# Altium PCB B232.PcbDoc
Units mm, origin at the board's own origin, x right, y up, seen from the top; angles counter-clockwise.
Board outline 40 x 22 mm, 4 copper layers (Top Copper, Signal Layer 1, Signal Layer 2, Bottom Copper), stack 1.57 mm thick; 17 components, 23 nets, 125 pads, 275 vias.
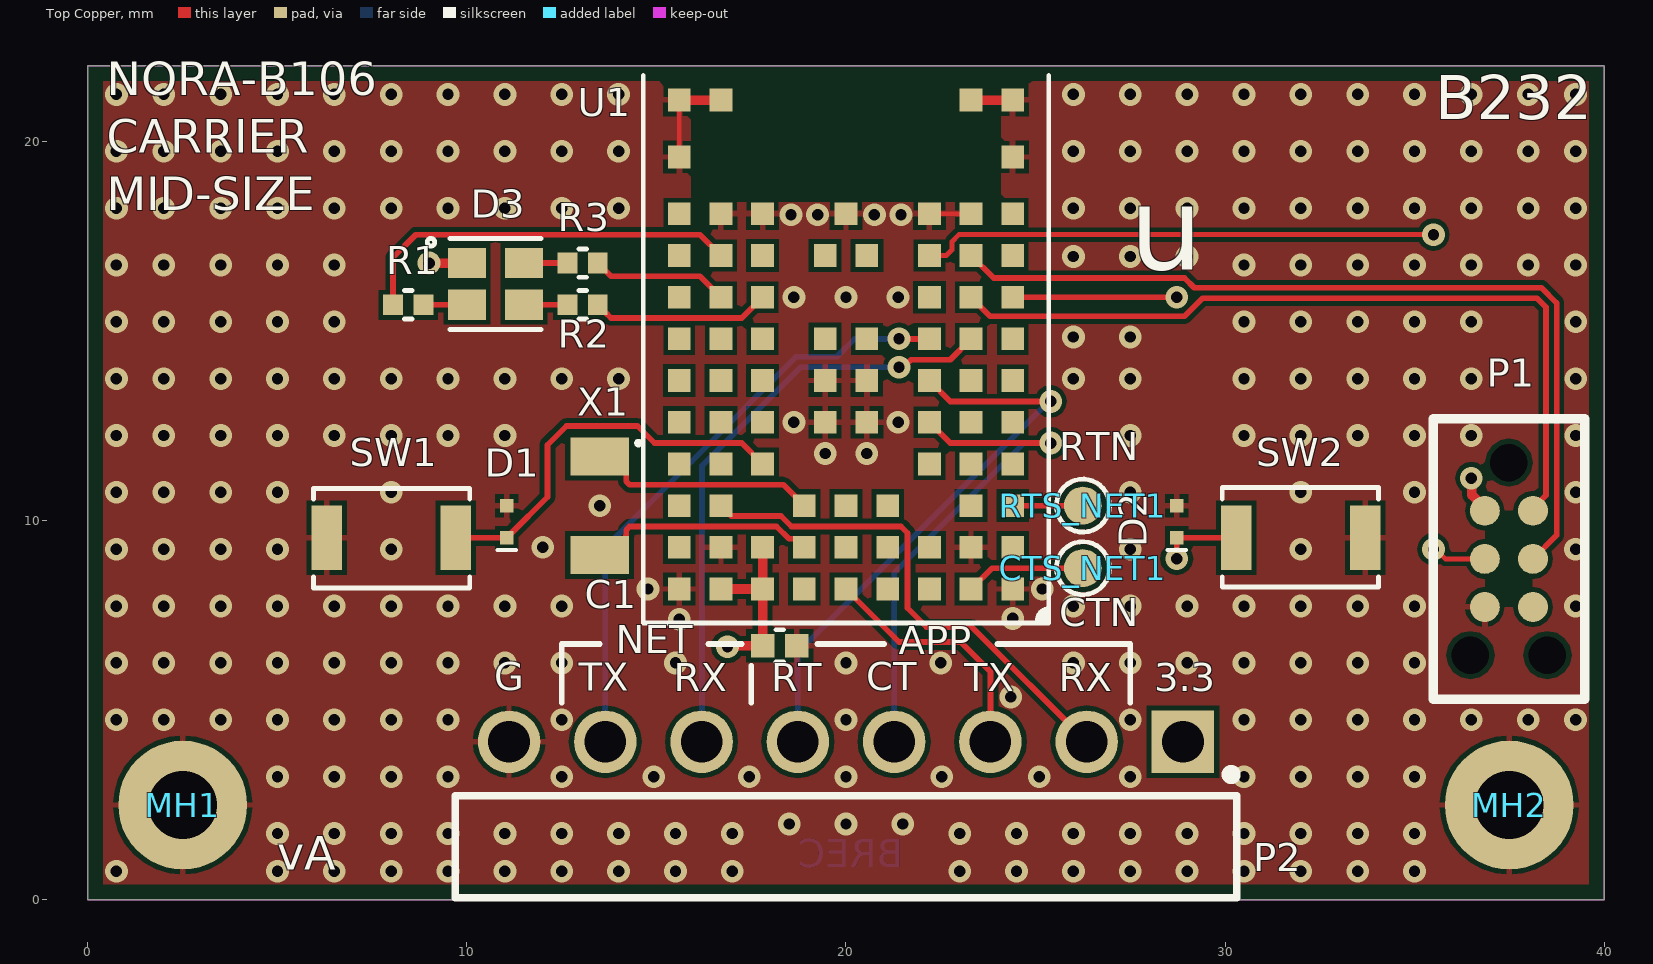
[diagram p0: Top Copper view]
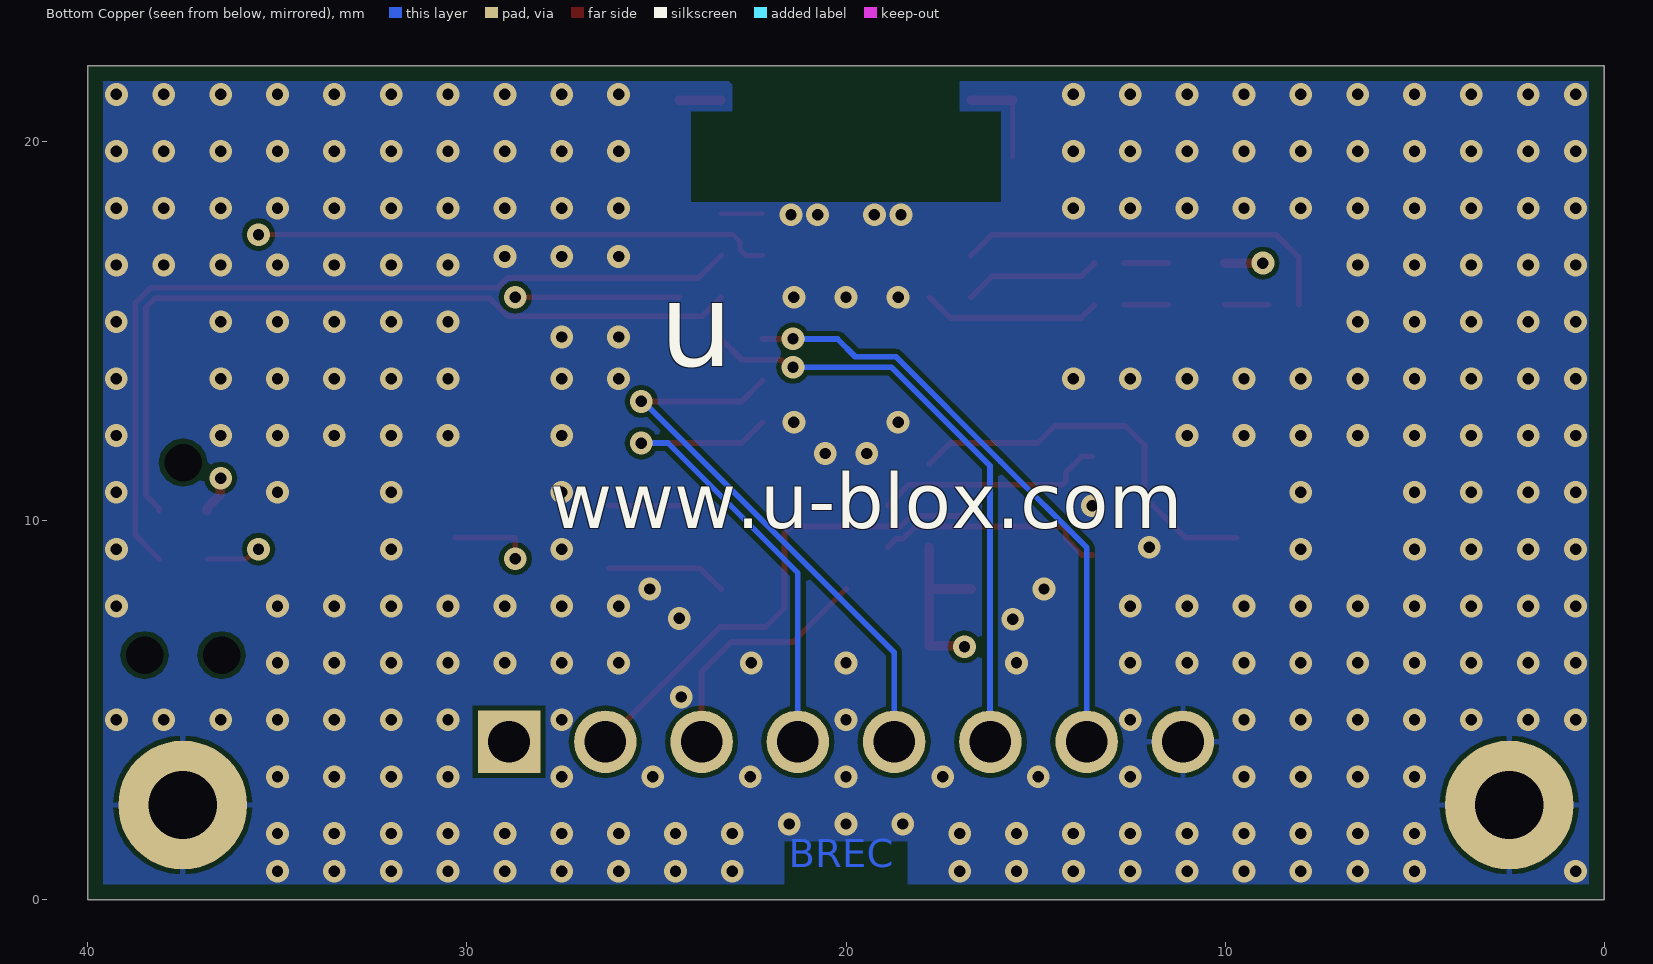
[diagram p1: Bottom Copper view, seen from below]
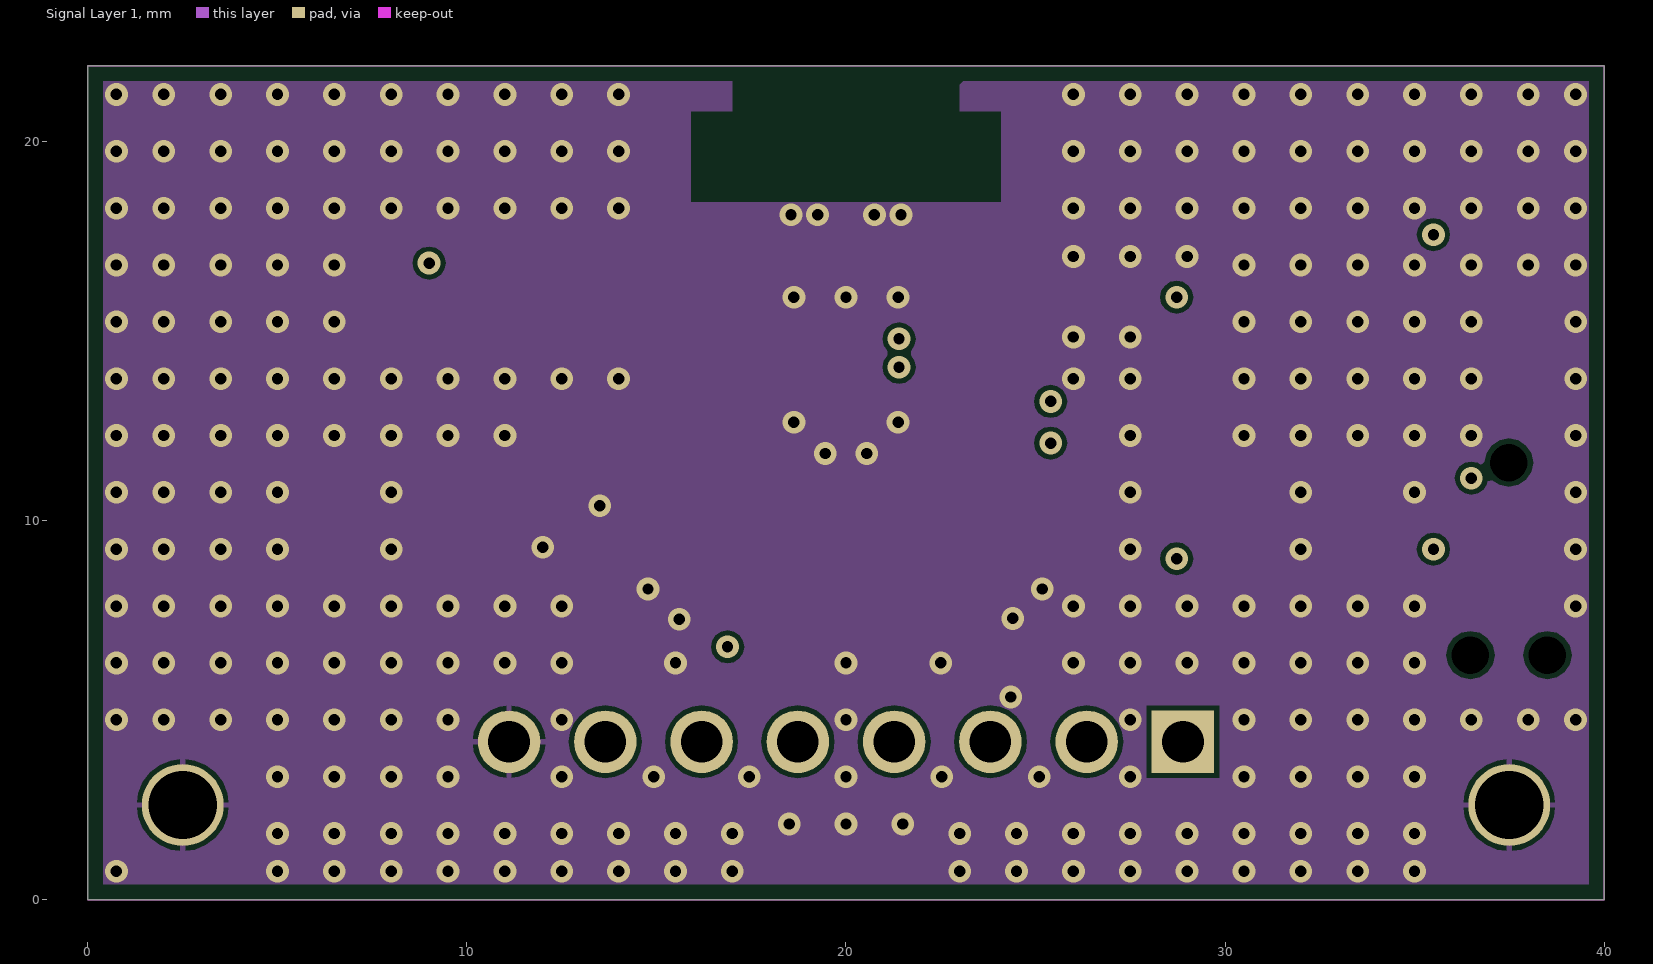
[diagram p2: Signal Layer 1]
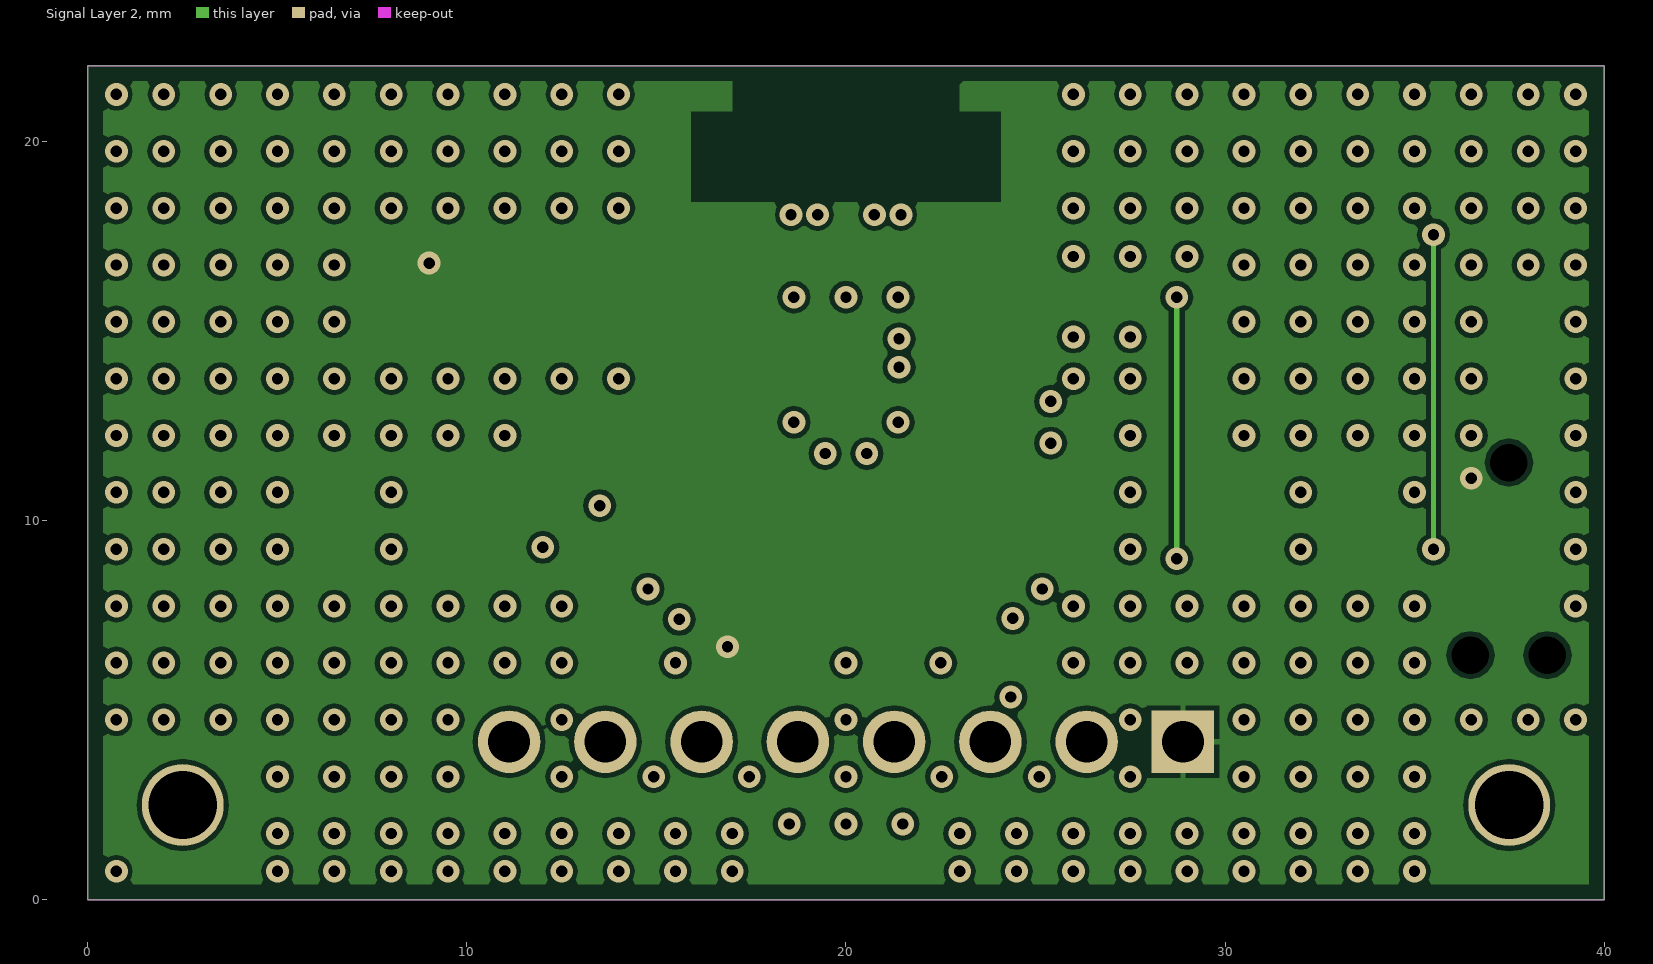
[diagram p3: Signal Layer 2]

## Layer stack, top to bottom
Top Mask: solder mask 0.015, Solder Resist, Dk 3.8
Top Copper: signal copper 0.035
Dielectric 1: prepreg 0.1, 2313, Dk 4.05
Signal Layer 1: signal copper 0.0175
Core: core 1.265, FR-4, Dk 4.5
Signal Layer 2: signal copper 0.0175
Dielectric 2: prepreg 0.1, 2313, Dk 4.05
Bottom Copper: signal copper 0.035
Bottom Mask: solder mask 0.015, Solder Resist, Dk 3.8

## Board outline
0,22 40,22 40,0 0,0

## Design rules (kind name [scope] priority, off if disabled: settings)
BoardOutlineClearance [All] p1: gap=0.4 ignorepadtopadclearanceinfootprint=FALSE
Clearance "Stitching GND" [IsStitchingVia and InNet('GND') vs (IsVia and (Not IsStitchingVia)) Or IsPad] p1: gap=0.127 ignorepadtopadclearanceinfootprint=TRUE
Clearance Clearance_Poly [InPolygon vs OnLayer('Keep-Out Layer') OR (OnLayer('Multi-Layer') AND IsPad  AND Not(PadIsPlated))] p2: gap=0.127 ignorepadtopadclearanceinfootprint=TRUE
Clearance [All] p3: gap=0.127 ignorepadtopadclearanceinfootprint=FALSE except(0: Arc-Text Arc-Hole Track-Text Track-Hole SMDPad-Text SMDPad-Hole THPad-Text THPad-Hole Via-Text Via-Hole Fill-Text Fill-Hole Poly-Text Poly-Hole Region-Text Region-Hole Text-Text Text-Hole)
ComponentClearance [All] p1: gap=0.127 collisioncheckmode=3 verticalgap=0.254 showdistances=FALSE
DiffPairsRouting .14 [All] p1: maxlimit=0.254 minlimit=0.1 mostfreqgap=0.254 toplayer_maxgap=0.1 toplayer_prefgap=0.1 toplayer_minwidth=0.1 toplayer_maxwidth=0.1 toplayer_prefwidth=0.1 midlayer1_mingap=0.254 midlayer1_minwidth=0.381 midlayer1_maxwidth=0.381 midlayer1_prefwidth=0.381 midlayer2_mingap=0.254 midlayer2_minwidth=0.381 midlayer2_maxwidth=0.381 midlayer2_prefwidth=0.381 bottomlayer_maxgap=0.1 bottomlayer_prefgap=0.1 bottomlayer_minwidth=0.1 bottomlayer_maxwidth=0.1 bottomlayer_prefwidth=0.1 maxuncoupledlength=12.7
Height [All] p1: minheight=0 maxheight=25.4 prefheight=2.54
HoleSize [All] p1: absolutevalues=TRUE maxlimit=2540 minlimit=0.127 maxpercent=80.000 minpercent=20.000
HoleToHoleClearance [All] p1: gap=0.152 allowstackedmicrovias=TRUE
MinimumSolderMaskSliver [All] p1: minsoldermaskwidth=0.025
PlaneClearance [InPoly] p1: clearance=0.254
PlaneConnect [All] p1: pad.planeconnectstyle=Relief pad.reliefexpansion=0.508 pad.reliefentries=4 pad.reliefconductorwidth=0.254 pad.reliefairgap=0.254 via.planeconnectstyle=Direct via.reliefexpansion=0.508 via.reliefentries=4 via.reliefconductorwidth=0.254 via.reliefairgap=0.254
PolygonConnect ThermalVias [IsVia] p1: connectstyle=Direct reliefconductorwidth=0.254 reliefentries=4 polygonreliefangle="90 Angle" airgapwidth=0.254
PolygonConnect "PolygonConnect - Power" [InNetClass('')] p2: connectstyle=Relief reliefconductorwidth=0.254 reliefentries=4 polygonreliefangle="90 Angle" airgapwidth=0.127
PolygonConnect PolygonConnect-BGA [InComponentClass('')] p3: connectstyle=Relief reliefconductorwidth=0.152 reliefentries=4 polygonreliefangle="45 Angle" airgapwidth=0.152
PolygonConnect PolygonConnect-General [All] p4: connectstyle=Relief reliefconductorwidth=0.152 reliefentries=4 polygonreliefangle="90 Angle" airgapwidth=0.127
RoutingLayers [All] p1: top layer_v5=TRUE mid layer 1_v5=FALSE mid layer 2_v5=TRUE bottom layer_v5=TRUE
RoutingVias [All] p1: holewidth=0.3 width=0.6 viastyle="Through Hole" minholewidth=0.2 minwidth=0.5 maxholewidth=7 maxwidth=1
SMDEntry [All] p1 off: side=TRUE corner=TRUE anyangle=TRUE
SilkToBoardRegionClearance [All] p1 off:
SilkToSilkClearance [All] p1 off: silktosilkclearance=0.025
SilkToSolderMaskClearance [IsPad] p1 off: minsilkscreentomaskgap=0 clearancetoexposedcopper=TRUE
SolderMaskExpansion SolderMaskExpansion_via [IsVia] p1: expansion=-0.254 istentingtop=TRUE
SolderMaskExpansion [All] p2: expansion=0.05 istentingtop=FALSE
UnRoutedNet [All] p1: checkbadconnections=TRUE
ViasUnderSMD [All] p1: allowed=FALSE
Width [All] p1: maxlimit=2.54 minlimit=0.127 preferedwidth=0.152 toplayer_maxwidth=0.254 toplayer_prefwidth=0.152 bottomlayer_maxwidth=0.254 bottomlayer_prefwidth=0.152 minimp=50.000000 maximp=50.000000 favimp=50.000000
Width Width_1 [All] p2: maxlimit=0.254 minlimit=0.254 preferedwidth=0.254
17 further rules are at their usual default settings.

## Components (designator, comment, footprint, x,y, rotation, side; value= is the part's Value field where it differs from the comment)
C1 "UBXH01-2021002100N" "Cap 0402" 18.25,6.7 r0 top value=100N
CTS_NET1 "TP" TP10R 26.25,8.75 r90 top
D1 "110-00019" SOD-923 11.05,9.975 r90 top
D2 "110-00019" SOD-923 28.725,9.975 r90 top
D3 "115-00011" 4-PLCC 10.75,16.25 r180 top
MH1 "MH_M1.5DNP" MH_M1.5 2.5,2.5 r0 top
MH2 "MH_M1.5DNP" MH_M1.5 37.5,2.5 r0 top
P1 "TC2030-IDC-NLDNP" TC2030-IDC-NL 37.49,11.535 r270 top
P2 "61300811021" 61300811021 20,1.4 r0 top
R1 "180-00031499R" "RES 0402 HD" 8.45,15.7 r180 top value=499R
R2 "180-00098220R" "RES 0402 HD" 13.05,15.7 r0 top value=220R
R3 "180-00098220R" "RES 0402 HD" 13.05,16.8 r0 top value=220R
RTS_NET1 "TP" TP10R 26.25,10.4 r90 top
SW1 "135-00007" B3U-1000P 8,9.55 r180 top
SW2 "135-00007" B3U-1000P 32,9.55 r0 top
U1 "NORA-B106" NORA_LGA82R_1430X1040X180_ANT 20,13.7 r90 top
X1 "100-00005" XTAL_3215 13.5,10.4 r270 top

## Footprints (in the part's own frame and the unit in brackets; to place one, negate y for a bottom-side part, rotate by r counter-clockwise, add the part's x,y. Pads: shape width x height; smd on the part's side, far side on the other; paste and mask are expansions set on the pad)
4-PLCC [mm] "4 Pin Plastic Leaded Chip Carrier, 2mm x 2mm"
  rect 1x0.8 smd: 1(0.75,-0.55) 2(-0.75,-0.55) 3(-0.75,0.55) 4(0.75,0.55)
  silkscreen extent -1.2,-1.2 1.8,1.2, body extent -1.05,-1.05 1.05,1.05, height 1.01
61300811021 [mm]
  rect 1.65x1.65 hole 1.1: 1(8.89,2.77)
  round 1.65 hole 1.1: 2(6.35,2.77) 3(3.81,2.77) 4(1.27,2.77) 5(-1.27,2.77) 6(-3.81,2.77) 7(-6.35,2.77) 8(-8.89,2.77)
  silkscreen extent -10.31,-1.35 10.31,2.03, body extent -10.16,-7.27 10.16,3.09, height 2.58
B3U-1000P [mm] "Button Tactile, SMT 4mm x 2.5mm, height 1.2mm"
  rect 0.8x1.7 smd: 1(-1.7,0) 2(1.7,0)
  silkscreen extent -2.07,-1.3 2.05,1.33, body extent -2,-1.25 2,1.25, height 1.6
"Cap 0402" [mm] "Chip Capacitor, 2-Leads, Body 1.00x0.50mm, IPC Medium Density"
  rect 0.62x0.62 smd: 1(-0.45,0) 2(0.45,0)
  silkscreen extent -0.1,-0.43 0.1,0.43, body extent -0.55,-0.3 0.55,0.3, height 0.6
MH_M1.5 [mm] "Mounting Hole M1.5 Metric, 3.4mm diameter pad"
  round 3.4 / inner round 2.159 / far side round 3.4 hole 1.8: 1(0,0)
NORA_LGA82R_1430X1040X180_ANT [mm] "NORA LGA, 82pin ,1.1mm Pitch, 14.3mm x 10.4mm"
  rect 0.6x0.6 smd: A1(-5.5,-4.4) A2(-5.5,-3.3) A3(-5.5,-2.2) A4(-5.5,-1.1) A5(-5.5,0) A6(-5.5,1.1) A7(-5.5,2.2) A8(-5.5,3.3) A9(-5.5,4.4) B1(-4.4,-4.4) B2(-4.4,-3.3) B3(-4.4,-2.2) B4(-4.4,-1.1) B5(-4.4,0) B6(-4.4,1.1) B7(-4.4,2.2) B8(-4.4,3.3) B9(-4.4,4.4) C1(-3.3,-4.4) C2(-3.3,-3.3) C4(-3.3,-1.1) C5(-3.3,0) C6(-3.3,1.1) C8(-3.3,3.3) C9(-3.3,4.4) D1(-2.2,-4.4) D2(-2.2,-3.3) D3(-2.2,-2.2) D7(-2.2,2.2) D8(-2.2,3.3) D9(-2.2,4.4) E1(-1.1,-4.4) E2(-1.1,-3.3) E3(-1.1,-2.2) E4(-1.1,-0.55) E5(-1.1,0.55) E7(-1.1,2.2) E8(-1.1,3.3) E9(-1.1,4.4) F1(0,-4.4) F2(0,-3.3) F3(0,-2.2) F4(0,-0.55) F5(0,0.55) F7(0,2.2) F8(0,3.3) F9(0,4.4) G1(1.1,-4.4) G2(1.1,-3.3) G3(1.1,-2.2) G4(1.1,-0.55) G5(1.1,0.55) G7(1.1,2.2) G8(1.1,3.3) G9(1.1,4.4) H1(2.2,-4.4) H2(2.2,-3.3) H3(2.2,-2.2) H7(2.2,2.2) H8(2.2,3.3) H9(2.2,4.4) J1(3.3,-4.4) J2(3.3,-3.3) J3(3.3,-2.2) J4(3.3,-0.55) J5(3.3,0.55) J7(3.3,2.2) J8(3.3,3.3) J9(3.3,4.4) K1(4.4,-4.4) K2(4.4,-3.3) K3(4.4,-2.2) K5(4.4,0) K7(4.4,2.2) K8(4.4,3.3) K9(4.4,4.4) L1(5.9,-4.4) L9(5.9,4.4) M1(7.4,-4.4) M2(7.4,-3.3) M8(7.4,3.3) M9(7.4,4.4)
  Multi-Layer pour cut-out: 7.1,-4.1 7.1,-3.001 7.9,-2.998 7.9,-5.225 8.25,-5.225 8.25,5.325 7.9,5.325 7.9,3 7.1,3 7.1,4.1 4.7,4.1 4.7,-4.1
  silkscreen extent -6.4,-5.35 8.05,5.35, body extent -6.25,-5.2 8.05,5.2, height 1.78
"RES 0402 HD" [mm] "Chip Resistor, 2-Leads, Body 1.05x0.54mm, IPC High Density"
  rect 0.52x0.55 smd: 1(-0.4,0) 2(0.4,0)
  silkscreen extent -0.1,-0.38 0.1,0.38, body extent -0.55,-0.3 0.55,0.3, height 0.4
SOD-923 [mm] "SOD-923, 2-Leads, Body 1.25x2.50mm, IPC High Density,"
  rect 0.36x0.35 smd mask+0.05: 1(-0.42,0) 2(0.42,0)
  silkscreen extent -0.75,-0.25 -0.75,0.25, body extent -0.4,-0.3 0.4,0.3, height 0.4
TC2030-IDC-NL [mm] "Tag-Connect 6-Pin No Legs"
  round 0.9 hole 0.995 unplated: 0(0,0) 0(5.08,-1.016) 0(5.08,1.016)
  round 0.79 smd paste-0.39: 1(1.27,-0.635) 2(1.27,0.635) 3(2.54,-0.635) 4(2.54,0.635) 5(3.81,-0.635) 6(3.81,0.635)
  silkscreen extent -1.16,-2 6.24,2
TP10R [mm] "Testpoint, Round 1.0mm Dia"
  round 1 smd paste-0.5: 1(0,0)
  silkscreen extent -0.7,-0.7 0.7,0.7, body extent -0.5,-0.5 0.5,0.5, height 0.05
XTAL_3215 [mm] "XTAL, 2-Leads, Body 1.50x3.20mm"
  rect 1x1.55 smd: 1(-1.3,0) 2(1.3,0)
  silkscreen extent -1.7,0.98 -1.6,1.07, body extent -1.65,-0.8 1.65,0.8, height 0.9

## Part data
C1: library part UBXH01-2021002, "CAP CER X5R 0402", Manufacturer="Samsung Electro-Mechanics", Manufacturer 2=None, Manufacturer P/N=CL05A104KP5NNN, Max Voltage=10.0V, Tolerance=10%, Automotive=None, Critical=None, Editor=roland.rust, Env=GREEN, Manufacturer 3=None, Manufacturer P/N 2=None, Manufacturer P/N 3=None, Max Current=None, Max Operating Temp=None, Max Power=None, Mfg P/N Datasheet=https://wiki.u-blox.com/bin/view/Generic/Docs/DocumentSummary?index=28113, Mfg P/N Datasheet 2=None, Mfg P/N Datasheet 3=None, Mfg P/N Released=Yes, Mfg P/N Released 2=None, Mfg P/N Released 3=None, Mfg P/N Split=0, Mfg P/N Split 2=None, Mfg P/N Split 3=None, Mfg P/N Status=Active, Mfg P/N Status 2=None, Mfg P/N Status 3=None, Min Operating Temp=None, Part Number=UBXH01-2021002, Part Type=Capacitor, Perferred=PREF, Permitted Use="Volume Products", RefDes=C, Release Data="2005-07-22 13:59:44", Released by=roland.rust, Single Source=None, Size=0x0y, UBX Wiki=https://wiki.u-blox.com/bin/view/Operations/PartDetails?index=5759
CTS_NET1 RTS_NET1: library part TP10R, "Testpoint, Round 1.0mm Dia", Added By="Jeremy D", Added Date=2/1/2015, Checked By="Paul B", Checked Date=2/5/2015, DNP=DNP, Height=0, Part Number=TP10R, Size=1.0mm
D1 D2: "Diode, ESD9B, 3.3V, ST5G, SOD-923", Manufacturer="ON Semiconductor", Manufacturer P/N=ESD9B3.3ST5G, MFG Package=SOD-923, Package Type=SOD, Part Name="Diode TVS 3.3V SOD-923", Voltage=3.3V, Arena Link=https://app.bom.com/a/4M5DJQ9Q9SR7DV4H?v=spec.summary, Body Size="0.8mm x 0.6mm", Component Mounting Type=SMT, Diode Type=TVS, Height=0.4mm, Item_Phase=Production, Part Number=110-00019, Part_Type=Diode, Pins=2, Revision=0A, Supplier 1=Arrow, Supplier Part Number 1=ESD9B3.3ST5G, Use in new designs=Yes
D3: "LED, RGB Diffused SMT, PLCC4 4 Pin", Color=RGB, Current="20mA Red, 10mA Green, 10mA, Blue", Manufacturer="Cree, Inc.", Manufacturer P/N=CLMVB-FKA-CFHEHLCBB7a363, MFG Package=PLCC4, Package Type=Custom, Part Name="LED RGB SMT 2mm x 2mm", Supplier Part Number 1=941-CLMVBFKACFHEHLCB, Voltage=5V, Arena Link=https://app.bom.com/a/UCV39GZGZIHY581D?v=spec.summary, Body Size="2.0mm x 2.0mm", Component Mounting Type=SMT, Height=1mm, Item_Phase=Production, Mounting Type=Vertical, Number of Circuits=3, Part Number=115-00011, Part_Type=LED, Pins=4, Revision=0A, Supplier 1=Mouser, Use in new designs=Yes, Vf="2V Red, 3V Green, 3V Blue"
MH1 MH2: library part MH_M1.5, "1.5M screw mounting hole, plated", Added By="Jeremy D", Added Date=7/9/2015, DNP=DNP, Height=0mm, Part Number=MH_M1.5, Size="3.4mm x 3.4mm", Type="Mounting Hole"
P1: library part TC2030-IDC-NL, "CON PADS FOR CBL PLUG-OF-NAILS 6-PIN NO LEGS", Manufacturer="TAG Connect", Added By="Paul B", Added Date=4/22/2015, DNP=DNP, Height=0, Manufacturer P/N=TC2030-IDC-NL, Part Number=TC2030-IDC-NL, Size="6.731mm x 12.446mm"
P2: library part CMP-1502-01075-1, "THT Angled Pin Header WR-PHD, Pitch 2.54 mm, Single Row, 8 pins", Contact Resistance=20mOhm, Manufacturer="Wurth Electronics", Operating Temperature=-40to105degC, Rated Current=3A, Withstanding Voltage=500VAC, Working Voltage=250VAC, Datasheet URL=https://katalog.we-online.de/em/datasheet/6130xx11021.pdf, Gender=Male, Manufacturer Part Number=61300811021, Manufacturer URL=http://www.we-online.de, Mounting Technology=THT, Orientation=Angled, Package Reference=61300811021, Packaging=Bag, Part Number=61300811021, Pin Number=8, Pitch=2.54mm, Publisher=WurthElektronik, Row Number=Single
R1: library part 180-00031, "Resistor, 499ohm, 1%, 1/16W, 0402", Manufacturer="Rohm Semiconductor", Manufacturer 2="Samsung Electro-Mechanics America, Inc", Manufacturer P/N=MCR01MRTF4990, Manufacturer P/N 2=RC1005F4990CS, Part Name="RES SMD 499 OHM 1% 1/16W 0402", Power=1/16W, Supplier Part Number 1=RHM499CDCT-ND, Tolerance="+/- 1%", Alternate Footprint Ref="RES 0402", Arena Link=https://app.bom.com/a/Q8RZ5CVCVEDU1SS5?v=spec.summary, Component Mounting Type=SMT, Height=0.4mm, Item_Phase=Production, Part Number=180-00031, Part_Type=Resistor, Pins=2, Revision=0D, Size=0402, Supplier 1=Digi-Key, Supplier 2=Digi-Key, Supplier Part Number 2=1276-3992-1-ND, Use in new designs=Yes
R2 R3: library part 180-00098, "Resistor, 220ohm, 5%, 1/16W, 0402.", Manufacturer="Panasonic Electronic Components", Manufacturer 2="Samsung Electro-Mechanics America, Inc", Manufacturer P/N=ERJ-2GEJ221X, Manufacturer P/N 2=RC1005J221CS, Part Name="RES SMD 220 OHM 5% 1/16W 0402", Power=1/16W, Supplier Part Number 1=P220JCT-ND, Tolerance="+/- 5%", Alternate Footprint Ref="RES 0402", Arena Link=https://app.bom.com/a/8Q9HNUDUDWVBJC30?v=spec.summary, Component Mounting Type=SMT, Height=0.4mm, Item_Phase=Production, Part Number=180-00098, Part_Type=Resistor, Pins=2, Revision=0C, Size=0402, Supplier 1=Digi-Key, Supplier 2=Digi-Key, Supplier Part Number 2=1276-4360-1-ND, Use in new designs=Yes
SW1 SW2: "Button, Momentary SPST-NO, 0.05A, 12V, 3mm x 2.5mm", Current=50mA, Manufacturer="Omron Electronics Inc-EMC Div", Manufacturer P/N=B3U-1000P, Part Name="SWITCH TACTILE SPST-NO 0.05A 12V", Supplier Part Number 1=SW1020CT-ND, Voltage=12VDC, Arena Link=https://app.bom.com/a/TBU28FYFYHGV5FQ0?v=spec.summary, Body Size="3mm x 2.5mm", Component Mounting Type=SMT, Height=1.2mm, Item_Phase=Production, Part Number=135-00007, Part_Type=Button, Pins=2, Revision=0A, Supplier 1=Digi-Key, Switch/Button Circuit=SPST, Switch/Button Function=Off-Mom, Use in new designs=Yes
U1: "u-blox NORA-B106 Bluetooth 5.2 LE module - dual core", Manufacturer=u-blox, Manufacturer P/N=NORA-B106-00B, Body Size="14.3 mm x 10.4 mm", Height="1.8 mm", Part Description="Stand-alone Bluetooth low energy module - dual core", Part Name=NORA-B106, Part Number=NORA-B106, Part_Type=Module
X1: "XTAL, 2Pin, 32.768kHz, 7pF 20ppm", Frequency=32.768kHz, Frequency Tolerance=20ppm, Manufacturer=Epson, Manufacturer 2="AVX Corporation", Manufacturer P/N="FC-135 32.7680KA-AG3", Manufacturer P/N 2=ST3215SB32768C0HPWBB, MFG Package=2-SMD, Part Name="XTAL 32.768kHz 7pF 20ppm 3215", Supplier Part Number 1=SER4086CT-ND, Arena Link=https://app.bom.com/a/L3MU07Q7Q98O5PC8?v=spec.summary, Body Size="3.2mm x 1.5mm", CL=7pF, Component Mounting Type=SMT, Height=0.9mm, Item_Phase=Production, Part Number=100-00005, Part_Type=Crystal/Oscillator, Pins=2, Revision=0C, Supplier 1=Digi-Key, Supplier 2=Digi-Key, Supplier Part Number 2=1253-1113-1-ND, Use in new designs=Yes

## Via types
v1: diameter 0.6, hole 0.3, Top Copper to Bottom Copper, tented both sides, 275 vias

## Nets (pads, with @x,y where several pads share a name; then routed paths per layer and width w, separated by ;. In a path a pad name is that pad's centre, name@x,y a point inside that pad or via, vN(x,y) a via of type N, cw(c..) or ccw(c..) an arc to the next point about the centre after c; other vN are vias at no path point)
3V3: C1.1 D3.1 P1.1 P2.1 U1.A7 U1.A8 U1.B7 | length 6.6
  Top Copper w0.254: v1(9,16.8) D3.1 ; U1.A8 U1.A7 ; v1(16.875,6.675) 16.9,6.7 C1.1 17.8,6.804 U1.A7 ; U1.B7 U1.A7 ; v1(36.5,11.125) 36.512,11.113 36.512,10.682 36.855,10.339 P1.1
BLUE: R3.2 U1.H8 | length 3.6
  Top Copper w0.152: R3.2 13.45,16.785 13.634,16.601 13.649,16.601 13.8,16.45 16.15,16.45 U1.H8
BUTTON_1: D1.1 SW1.1 U1.D7 | length 10.5
  Top Copper w0.152: SW1.1 9.705,9.555 D1.1 11.05,9.56 11.149,9.659 11.154,9.659 12.125,10.63 12.125,12 12.625,12.5 14.5,12.5 14.95,12.05 17.25,12.05 U1.D7
BUTTON_2: D2.1 SW2.1 U1.H1 | length 13.4
  Top Copper w0.152: U1.H1 v1(28.725,15.9) ; v1(28.725,9) D2.1 30.295,9.555 SW2.1
  Signal Layer 2 w0.152: v1(28.725,9) v1(28.725,15.9)
CTS_APP: P2.4 U1.E3 | length 13.4
  Top Copper w0.152: U1.E3 22.75,12.05 v1(25.4,12.05)
  Bottom Copper w0.152: P2.4 21.27,8.625 24.695,12.05 v1(25.4,12.05)
CTS_NET: CTS_NET1.1 U1.A2 | length 3.2
  Top Copper w0.152: U1.A2 23.85,8.75 CTS_NET1.1
GND: C1.2 D1.2 D2.2 MH1.1 MH2.1 P1.5 P2.8 SW1.2 SW2.2 U1.A1 U1.A9 U1.B2 U1.B8 U1.E4 U1.E5 U1.F4 U1.F5 U1.K2 U1.K3 U1.K5 U1.K7 U1.K8 U1.L1 U1.L9 U1.M1 U1.M2 U1.M8 U1.M9 | length 4.8
  Top Copper w0.127: U1.L9 U1.M9 ; U1.K3 U1.K2
  Top Copper w0.254: U1.M9 U1.M8 ; U1.M2 U1.M1
  other v1: 0.75,0.75 5,0.75 6.5,0.75 8,0.75 9.5,0.75 11,0.75 12.5,0.75 14,0.75 15.5,0.75 17,0.75 23,0.75 24.5,0.75 26,0.75 27.5,0.75 29,0.75 30.5,0.75 32,0.75 33.5,0.75 35,0.75 5,1.75 6.5,1.75 8,1.75 9.5,1.75 11,1.75 12.5,1.75 14,1.75 15.5,1.75 17,1.75 23,1.75 24.5,1.75 26,1.75 27.5,1.75 29,1.75 30.5,1.75 32,1.75 33.5,1.75 35,1.75 18.5,2 20,2 21.5,2 5,3.25 6.5,3.25 8,3.25 9.5,3.25 12.5,3.25 14.925,3.25 17.45,3.25 20,3.25 22.525,3.25 25.1,3.25 27.5,3.25 30.5,3.25 32,3.25 33.5,3.25 35,3.25 0.75,4.75 2,4.75 3.5,4.75 5,4.75 6.5,4.75 8,4.75 9.5,4.75 12.5,4.75 20,4.75 27.5,4.75 30.5,4.75 32,4.75 33.5,4.75 35,4.75 36.5,4.75 38,4.75 39.25,4.75 24.35,5.35 0.75,6.25 2,6.25 3.5,6.25 5,6.25 6.5,6.25 8,6.25 9.5,6.25 11,6.25 12.5,6.25 15.5,6.25 20,6.25 22.5,6.25 26,6.25 27.5,6.25 29,6.25 30.5,6.25 32,6.25 33.5,6.25 35,6.25 15.6,7.4 24.4,7.425 0.75,7.75 2,7.75 3.5,7.75 5,7.75 6.5,7.75 8,7.75 9.5,7.75 11,7.75 12.5,7.75 26,7.75 27.5,7.75 29,7.75 30.5,7.75 32,7.75 33.5,7.75 35,7.75 39.25,7.75 14.775,8.2 25.175,8.2 0.75,9.25 2,9.25 3.5,9.25 5,9.25 8,9.25 27.5,9.25 32,9.25 39.25,9.25 12,9.3 13.5,10.4 0.75,10.75 2,10.75 3.5,10.75 5,10.75 8,10.75 27.5,10.75 32,10.75 35,10.75 39.253,10.75 19.45,11.775 20.55,11.775 0.75,12.25 2,12.25 3.5,12.25 5,12.25 6.5,12.25 8,12.25 9.5,12.25 11,12.25 27.5,12.25 30.5,12.25 32,12.25 33.5,12.25 35,12.25 36.5,12.25 39.253,12.25 18.625,12.6 21.375,12.6 0.75,13.75 2,13.75 3.5,13.75 5,13.75 6.5,13.75 8,13.75 9.5,13.75 11,13.75 12.5,13.75 14,13.75 26,13.75 27.5,13.75 30.5,13.75 32,13.75 33.5,13.75 35,13.75 36.5,13.75 39.253,13.75 26,14.85 27.5,14.85 0.75,15.25 2,15.25 3.5,15.25 5,15.25 6.5,15.25 30.5,15.25 32,15.25 33.5,15.25 35,15.25 36.5,15.25 39.253,15.25 18.625,15.9 20,15.9 21.375,15.9 0.75,16.75 2,16.75 3.5,16.75 5,16.75 6.5,16.75 30.5,16.75 32,16.75 33.5,16.75 35,16.75 36.5,16.75 38,16.75 39.25,16.75 26,16.972 27.5,16.972 29,16.972 18.55,18.075 19.25,18.075 20.75,18.075 21.45,18.075 0.75,18.25 2,18.25 3.5,18.25 5,18.25 6.5,18.25 8,18.25 9.5,18.25 11,18.25 12.5,18.25 14,18.25 26,18.25 27.5,18.25 29,18.25 30.5,18.25 32,18.25 33.5,18.25 35,18.25 36.5,18.25 38,18.25 39.25,18.25 0.75,19.75 2,19.75 3.5,19.75 5,19.75 6.5,19.75 8,19.75 9.5,19.75 11,19.75 12.5,19.75 14,19.75 26,19.75 27.5,19.75 29,19.75 30.5,19.75 32,19.75 33.5,19.75 35,19.75 36.5,19.75 38,19.75 39.25,19.75 0.75,21.25 2,21.25 3.5,21.25 5,21.25 6.5,21.25 8,21.25 9.5,21.25 11,21.25 12.5,21.25 14,21.25 26,21.25 27.5,21.25 29,21.25 30.5,21.25 32,21.25 33.5,21.25 35,21.25 36.5,21.25 38,21.25 39.25,21.25
GREEN: R2.2 U1.H7 | length 4.7
  Top Copper w0.152: R2.2 13.45,15.685 13.634,15.501 13.649,15.501 13.8,15.35 17.25,15.35 U1.H7
LFCLK1: U1.C6 X1.1 | length 6.1
  Top Copper w0.152: X1.1 13.775,11.7 14.199,11.276 14.199,11.188 14.2,11.187 14.2,11.039 14.289,10.95 18.35,10.95 U1.C6
LFCLK2: U1.B6 X1.2 | length 6.1
  Top Copper w0.152: X1.2 13.775,9.1 14.199,9.524 14.199,9.612 14.2,9.613 14.2,9.761 14.289,9.85 18.168,9.85 18.494,9.524 18.676,9.524 U1.B6
NetD3_2: D3.2 R3.1 | length 1.2
  Top Copper w0.152: D3.2 R3.1
NetD3_3: D3.3 R2.1 | length 1.2
  Top Copper w0.152: D3.3 R2.1
NetD3_4: D3.4 R1.1 | length 1.1
  Top Copper w0.152: R1.1 D3.4
nRESET: P1.3 U1.J3 | length 23.4
  Top Copper w0.127: U1.J3 22.65,17 22.797,17.147 22.797,17.366 22.981,17.55 v1(35.5,17.55) ; v1(35.5,9.25) 35.558,9.25 35.813,8.995 P1.3
  Signal Layer 2 w0.127: v1(35.5,9.25) v1(35.5,17.55)
RED: R1.2 U1.J8 | length 10.4
  Top Copper w0.152: R1.2 8.05,16.95 8.65,17.55 16.15,17.55 U1.J8
RTS_APP: P2.5 U1.F3 | length 15.2
  Top Copper w0.152: U1.F3 22.75,13.15 v1(25.4,13.15)
  Bottom Copper w0.152: P2.5 18.73,6.53 25.35,13.15 v1(25.4,13.15)
RTS_NET: RTS_NET1.1 U1.C1 | length 1.8
  Top Copper w0.152: U1.C1 RTS_NET1.1
RXD_APP: P2.2 U1.C8 | length 13.4
  Top Copper w0.152: U1.C8 16.971,10.129 18.284,10.129 18.563,9.85 21.45,9.85 21.625,9.675 21.625,7.7 22.125,7.2 23.32,7.2 P2.2
RXD_NET: P2.6 U1.G2 | length 15.8
  Top Copper w0.152: v1(21.4,14.05) 21.513,14.05 21.713,14.25 22.75,14.25 U1.G2
  Bottom Copper w0.152: P2.6 16.2,4.18 16.2,11.45 18.8,14.05 v1(21.4,14.05)
SWCLK: P1.4 U1.J2 | length 23
  Top Copper w0.152: U1.J2 23.897,16.403 28.933,16.403 29.186,16.15 38.35,16.15 38.75,15.75 38.75,9.62 P1.4
SWDIO: P1.2 U1.H2 | length 21.2
  Top Copper w0.152: U1.H2 23.803,15.397 28.933,15.397 29.407,15.871 38.234,15.871 38.471,15.634 38.471,10.673 38.125,10.327 P1.2
TXD_APP: P2.3 U1.A5 | length 6.6
  Top Copper w0.152: U1.A5 21.4,6.8 23.025,6.8 23.81,6.015 P2.3
TXD_NET: P2.7 U1.G3 | length 16
  Top Copper w0.152: v1(21.4,14.8) U1.G3
  Bottom Copper w0.152: P2.7 13.65,9.295 15.921,11.566 18.684,14.329 19.754,14.329 20.225,14.8 v1(21.4,14.8)
pads on no net: P1.0 P1.6 U1.A3 U1.A4 U1.A6 U1.B1 U1.B3 U1.B4 U1.B5 U1.B9 U1.C2 U1.C4 U1.C5 U1.C9 U1.D1 U1.D2 U1.D3 U1.D8 U1.D9 U1.E1 U1.E2 U1.E7 U1.E8 U1.E9 U1.F1 U1.F2 U1.F7 U1.F8 U1.F9 U1.G1 U1.G4 U1.G5 U1.G7 U1.G8 U1.G9 U1.H3 U1.H9 U1.J1 U1.J4 U1.J5 U1.J7 U1.J9 U1.K1 U1.K9

## Polygon pours and split planes (outlines as drawn)
GND on Top Copper "NONET_L-01_P-001" (solid, remove dead copper, pour order 1): 0,0 0,22 40,22 40,0
GND on Signal Layer 1 "NONET_L-01_P-001" (solid, remove dead copper, pour order 0): 0,0 0,22 40,22 40,0
3V3 on Signal Layer 2 "NONET_L-01_P-001" (solid, remove dead copper, pour order 2): 0,0 0,22 40,22 40,0
GND on Bottom Copper "NONET_L-01_P-001" (solid, remove dead copper, pour order 3): 0,0 0,22 40,22 40,0

## Keep-outs
Keep-Out Layer:
  the board outline again, w0.025

## Other copper
Top Copper:
  pour cut-out: 37.225,10.275 37.75,10.275 38.125,9.9 38.125,8.075 37.775,7.725 37.2,7.725 36.855,8.07 36.855,9.905 36.925,9.975
Bottom Copper:
  pour cut-out: 18.375,0.4 18.375,1.55 21.625,1.55 21.625,0.4
  text "BREC" at 21.512,0.614 h1.27

## Silkscreen, mask and mechanical layers (free items; w line width, h text height)
Top Overlay:
  lines w0.152: 12.5,5.2 12.5,6.75 13.5,6.75 ; 16.375,6.75 17.25,6.75 ; 17.5,5.2 17.5,6.175 ; 19.25,6.75 21,6.75 ; 24,6.75 27.5,6.75 27.5,5.2
  text "B232" at 35.543,20.213 h2
  text "NORA-B106 / CARRIER / MID-SIZE" at 0.5,17.9 h1.52
  text "u" at 27.489,15.904 h3.81
  text "RTN" at 25.625,11.344 h1.27
  text "CTN" at 25.625,6.969 h1.27
  text "NET" at 13.92,6.25 h1.27
  text "APP" at 21.389,6.225 h1.27
  text "G" at 10.724,5.272 h1.27
  text "TX" at 12.942,5.266 h1.27
  text "RX" at 15.461,5.256 h1.27
  text "RT" at 18.025,5.256 h1.27
  text "CT" at 20.534,5.272 h1.27
  text "TX" at 23.117,5.256 h1.27
  text "RX" at 25.611,5.256 h1.27
  text "3.3" at 28.136,5.247 h1.27
  text "vA" at 5,0.5 h1.52
Bottom Overlay:
  text "u" at 24.911,13.348 h3.81
  text "www.u-blox.com" at 27.806,9.309 h2.5
Route Tool Path:
  the board outline again, w0.127